# Altium PCB ampV1.PcbDoc
Units mil, origin at the board's own origin, x right, y up, seen from the top; angles counter-clockwise.
Board outline 3105 x 3105 mil, 2 copper layers (Top Layer, Bottom Layer); 56 components, 45 nets, 160 pads, 14 vias.
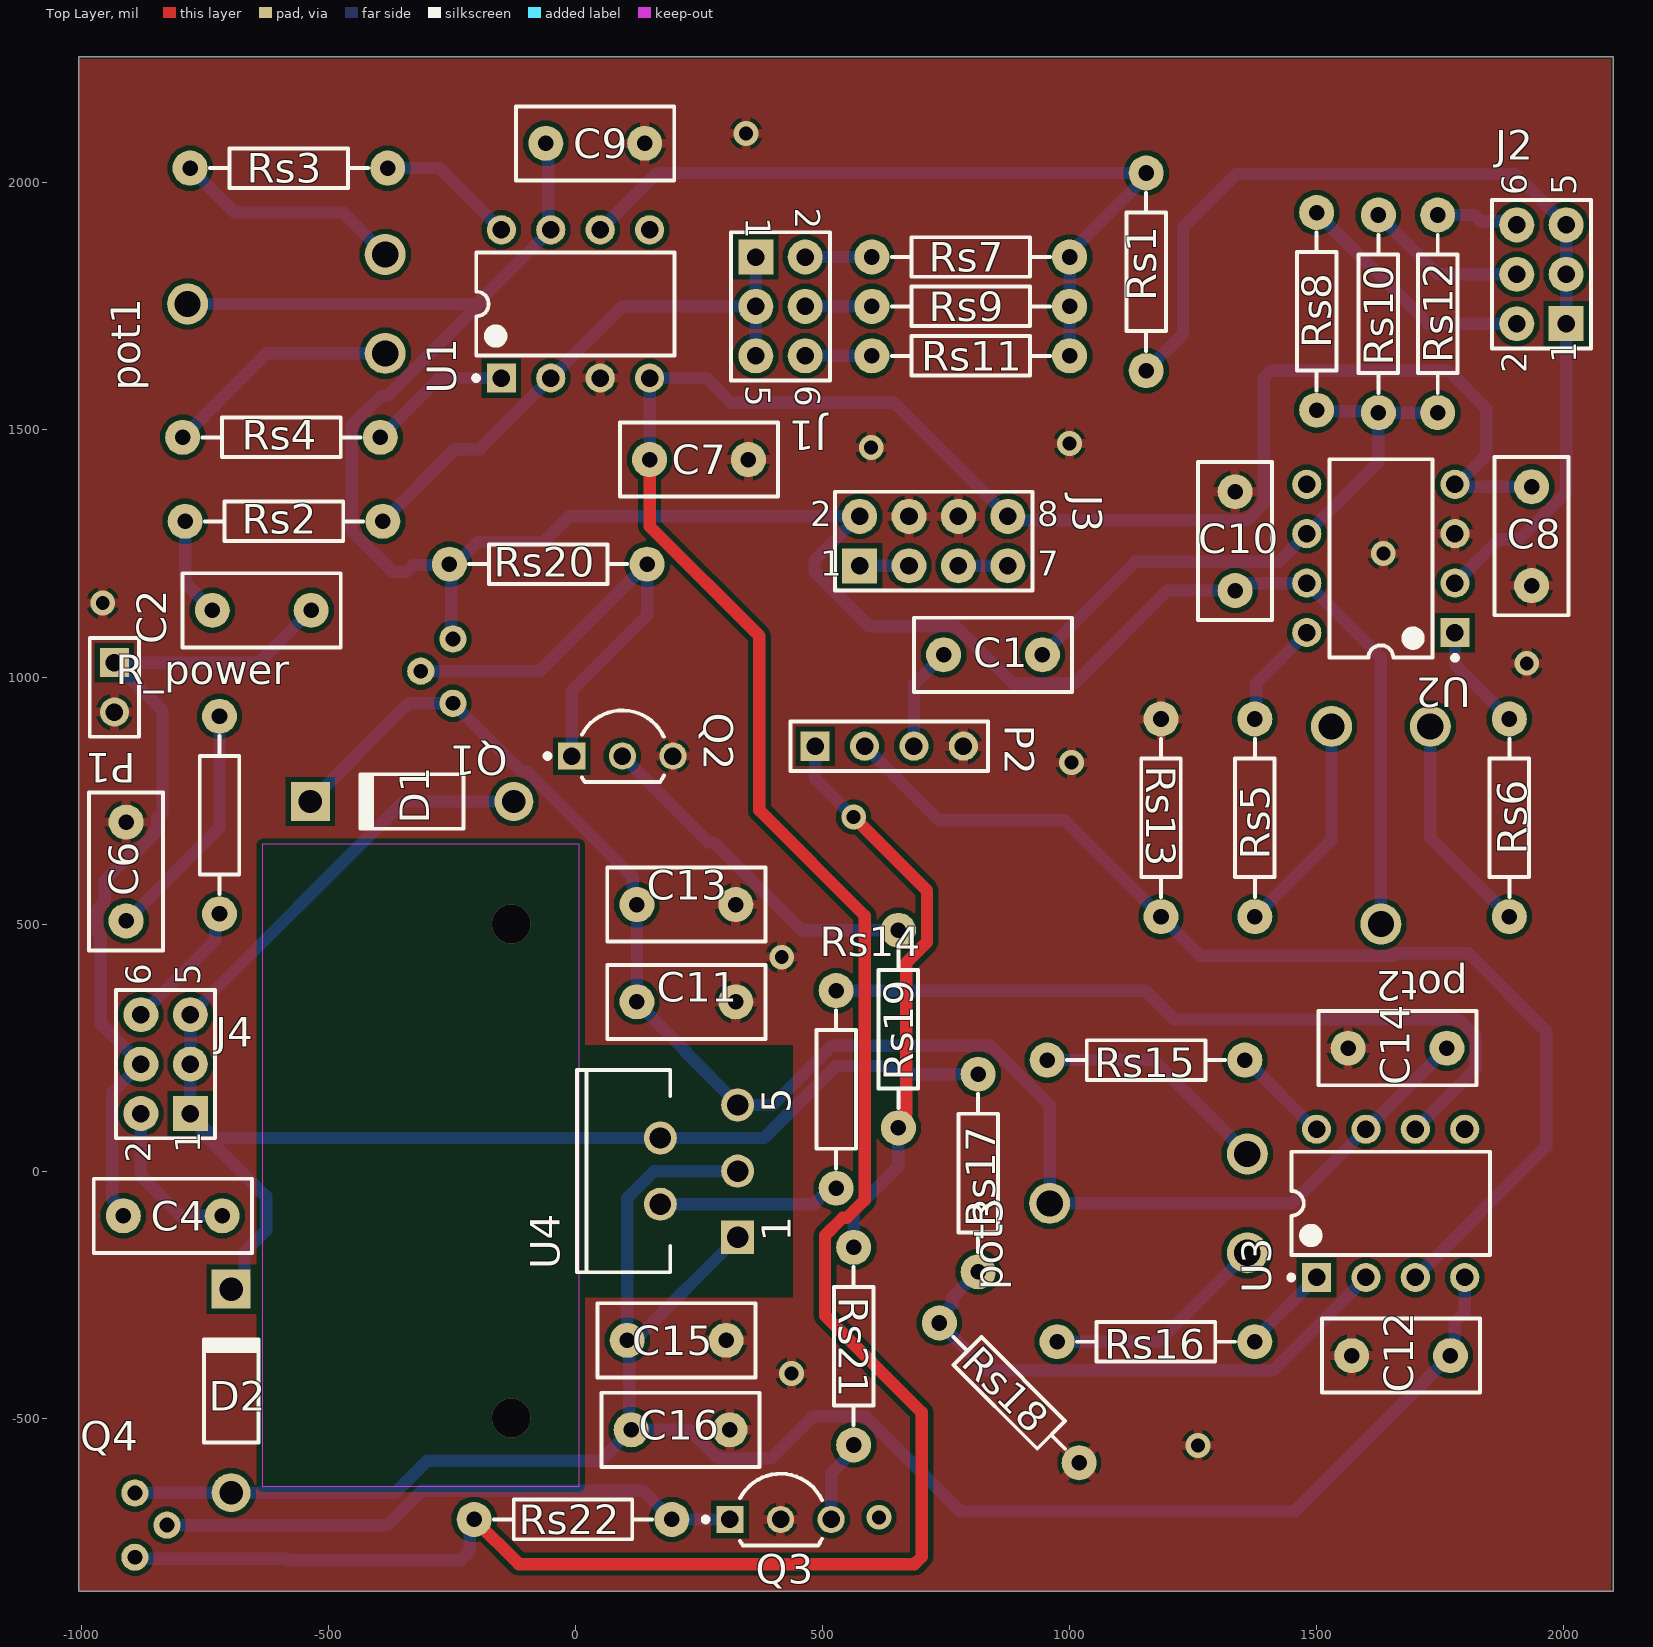
[diagram p0: Top Layer view]
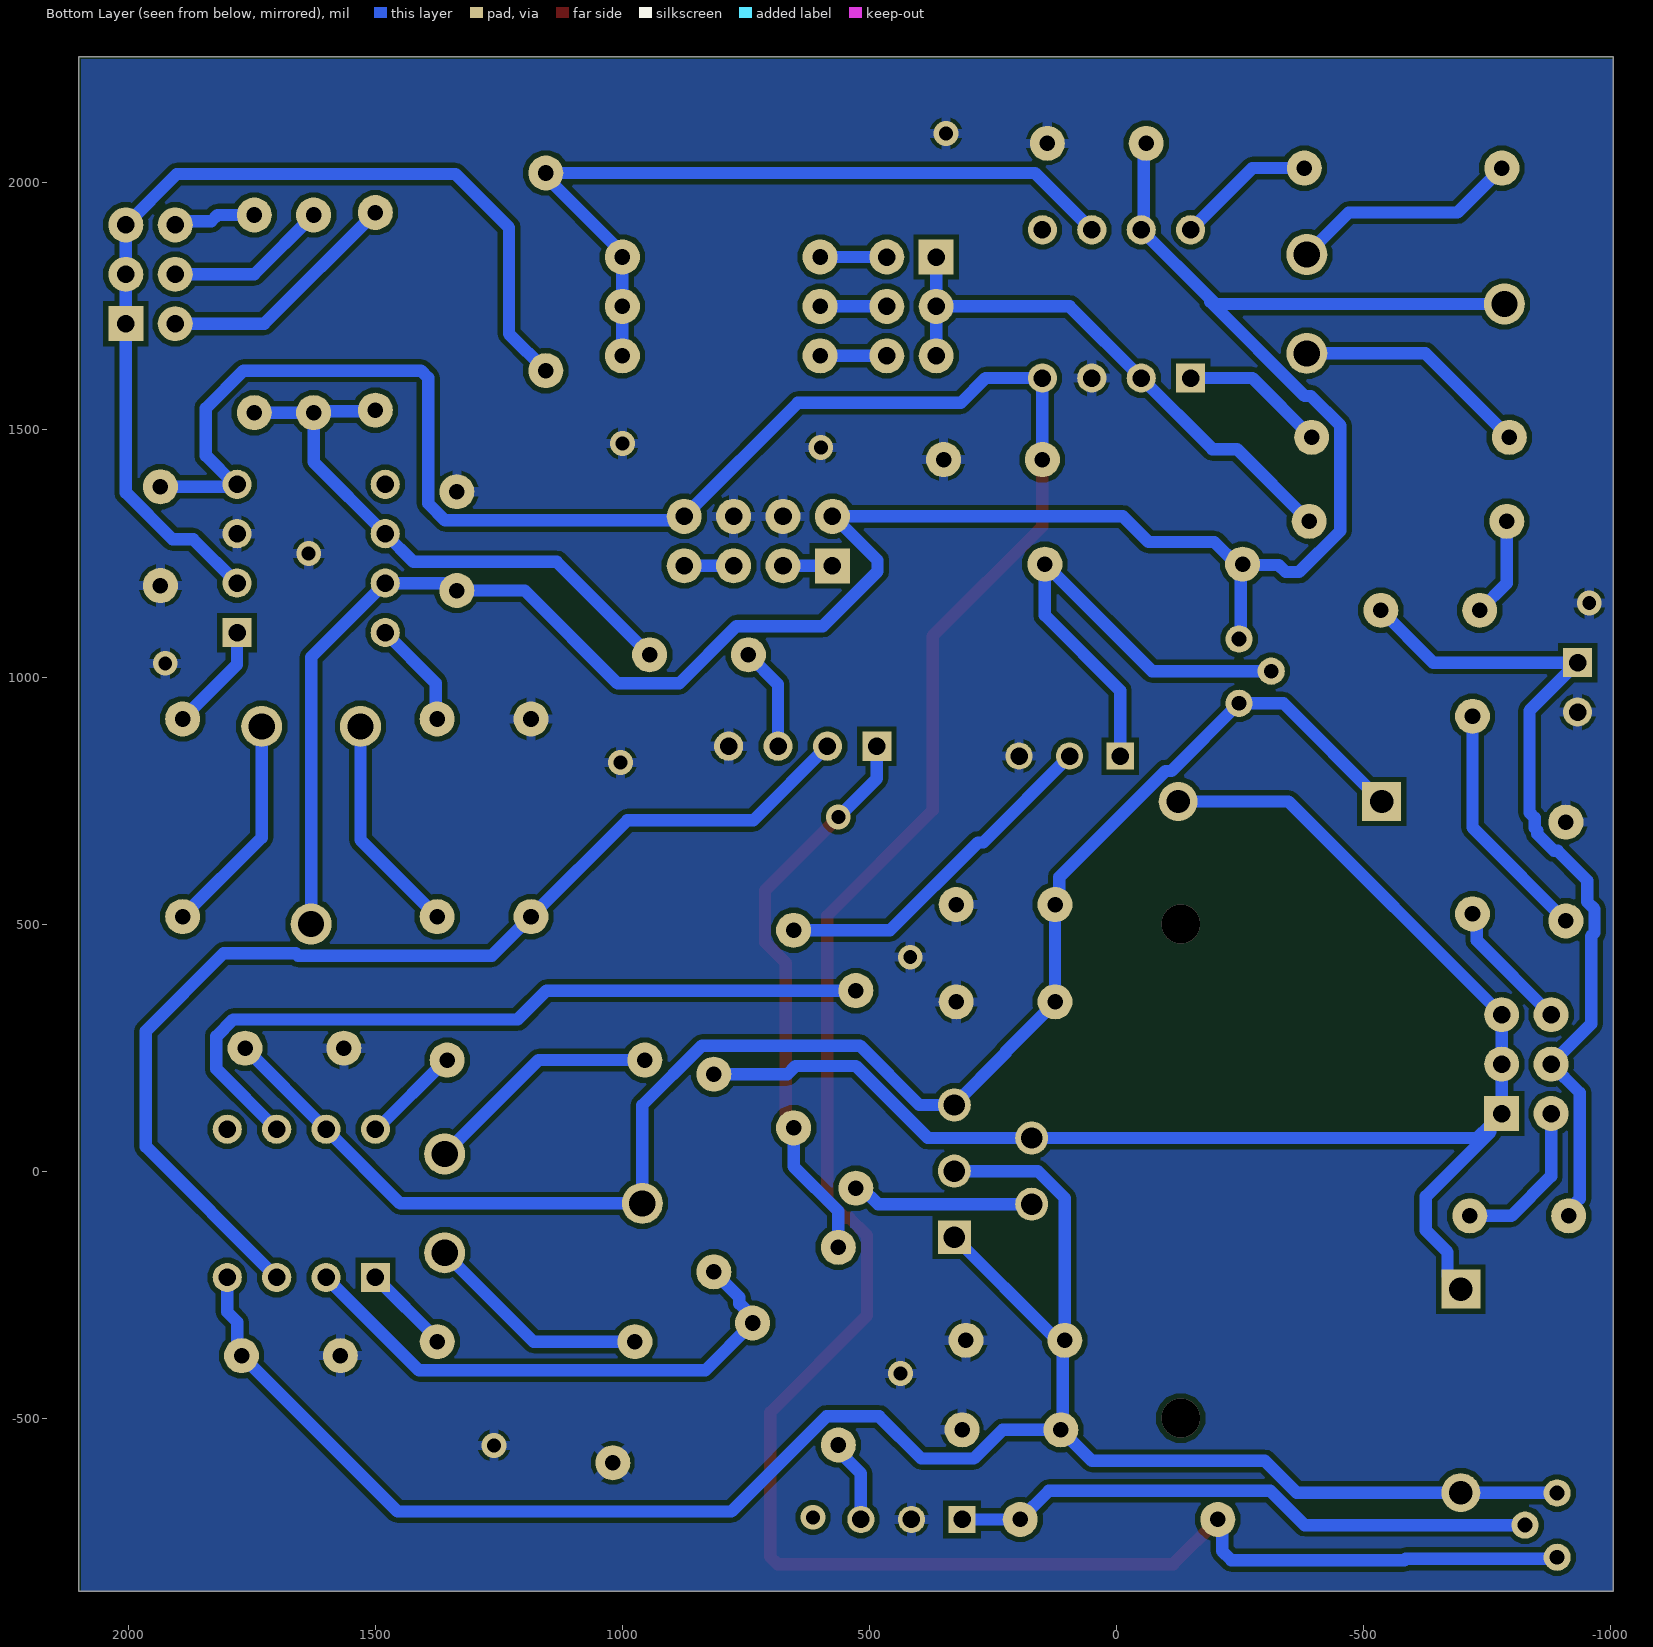
[diagram p1: Bottom Layer view, seen from below]

## Layer stack, top to bottom
Top Solder: solder mask 0.4, Solder Resist, Dk 3.5
Top Layer: signal copper 1.4
Dielectric 1: dielectric 12.6, FR-4, Dk 4.8
Bottom Layer: signal copper 1.4
Bottom Solder: solder mask 0.4, Solder Resist, Dk 3.5

## Board outline
-1005,-850 2100,-850 2100,2255 -1005,2255

## Design rules (kind name [scope] priority, off if disabled: settings)
Clearance [All] p1: gap=10 ignorepadtopadclearanceinfootprint=FALSE except(0: Arc-Hole Track-Hole SMDPad-Hole THPad-Hole Via-Hole Fill-Hole Poly-Hole Region-Hole Text-Hole)
HoleSize [All] p1: absolutevalues=TRUE maxlimit=118.11 minlimit=27.56 maxpercent=80.000 minpercent=20.000
MinimumSolderMaskSliver [All] p1: minsoldermaskwidth=4.92
PlaneConnect [All] p1: planeconnectstyle=Relief reliefexpansion=20 reliefentries=4 reliefconductorwidth=12 reliefairgap=10
PolygonConnect [All] p1: connectstyle=Relief reliefconductorwidth=19.68 reliefentries=4 polygonreliefangle="90 Angle" airgapwidth=7.87
RoutingVias [All] p1: holewidth=27.56 width=62.99 viastyle="Through Hole" minholewidth=27.56 minwidth=62.99 maxholewidth=27.56 maxwidth=62.99
SilkToSilkClearance [All] p1: silktosilkclearance=4.72
SilkToSolderMaskClearance [IsPad] p1: minsilkscreentomaskgap=3.94 clearancetoexposedcopper=TRUE
SolderMaskExpansion [All] p1: expansion=4 istentingtop=FALSE
Width [All] p1: maxlimit=120 minlimit=12 preferedwidth=20
25 further rules are at their usual default settings.

## Components (designator, comment, footprint, x,y, rotation, side; value= is the part's Value field where it differs from the comment)
C1 "Cap" "RAD-0.2  PCBK" 845,1045 r180 top value=100nF
C2 "Cap" "RAD-0.2  PCBK" -635,1135 r180 top value=100nF
C4 "Cap" "RAD-0.2  PCBK" -814.96,-90.55 r180 top value=47nF
C6 "Cap" "RAD-0.2  PCBK" -909.45,606.3 r90 top value=4.7uF
C7 "Cap" "RAD-0.2  PCBK" 250,1440 r180 top value=100nF
C8 "Cap" "RAD-0.2  PCBK" 1935,1285 r90 top value=100nF
C9 "Cap" "RAD-0.2  PCBK" 40,2080 r0 top value=100nF
C10 "Cap" "RAD-0.2  PCBK" 1335,1275 r90 top value=100nF
C11 "Cap" "RAD-0.2  PCBK" 224.41,342.52 r180 top value=100nF
C12 "Cap" "RAD-0.2  PCBK" 1670.81,-373.45 r0 top value=100nF
C13 "Cap" "RAD-0.2  PCBK" 224.41,539.37 r180 top value=4.7uF
C14 "Cap" "RAD-0.2  PCBK" 1663.74,248.8 r0 top value=100nF
C15 "Cap" "RAD-0.2  PCBK" 204.72,-342.52 r180 top value=100nF
C16 "Cap" "RAD-0.2  PCBK" 212.6,-523.62 r180 top value=4.7uF
D1 "Diode 1N4001" DO-41 -330.71,748.03 r180 top
D2 "Diode 1N4001" DO-41 -696.85,-444.88 r90 top
J1 "Header 3X2" "HDR2X3 PCBK" 365,1850 r270 top
J2 "Header 3X2" "HDR2X3 PCBK" 2005,1715 r90 top
J3 "Header 4X2" "HDR2X4 PCBK" 575,1225 r0 top
J4 "Header 3X2" "HDR2X3 PCBK" -779.53,116.54 r90 top
P1 "Transducer" HDR1X2 -933.07,1029.13 r270 top
P2 "Header 4" HDR1X4 485,860 r0 top
pot1 "1k" potMeter_3328P -485,1755 r90 top
pot2 "1k" potMeter_3328P 1630,800 r180 top
pot3 "1k" potMeter_3328P 1259.75,-65.25 r90 top
Q1 "2n2906" TO-18 -248.03,1011.81 r180 top
Q2 "BC547BRL1G" ONSC-TO-92-3-29-11_AM_BL 95,840 r0 top
Q3 "BC557CZL1G" ONSC-TO-92-3-29-11_AM_BL 415,-705 r0 top
Q4 "2n2221" TO-18 -891.77,-716.54 r0 top
R_power "10" "AXIAL-0.4 PCBK" -720.47,720.47 r90 top value=100
Rs1 "300" "AXIAL-0.4 PCBK" 1155,1820 r90 top value=100
Rs2 "1k" "AXIAL-0.4 PCBK" -590,1315 r180 top value=100
Rs3 "4.7k" "AXIAL-0.4 PCBK" -580,2030 r0 top value=100
Rs4 "4.7k" "AXIAL-0.4 PCBK" -595,1485 r0 top value=100
Rs5 "4.7k" "AXIAL-0.4 PCBK" 1375,715 r90 top value=100
Rs6 "4.7k" "AXIAL-0.4 PCBK" 1890,715 r90 top value=100
Rs7 "100k" "AXIAL-0.4 PCBK" 800,1850 r180 top value=100
Rs8 "300" "AXIAL-0.4 PCBK" 1500,1740 r90 top value=100
Rs9 "250k" "AXIAL-0.4 PCBK" 800,1750 r180 top value=100
Rs10 "3k" "AXIAL-0.4 PCBK" 1625,1735 r90 top value=100
Rs11 "500k" "AXIAL-0.4 PCBK" 800,1650 r180 top value=100
Rs12 "6k" "AXIAL-0.4 PCBK" 1745,1735 r90 top value=100
Rs13 "10k" "AXIAL-0.4 PCBK" 1185,715 r270 top value=100
Rs14 "ER VIA" "AXIAL-0.4 PCBK" 527.56,165.35 r90 top value=100
Rs15 "4.7k" "AXIAL-0.4 PCBK" 1154.75,224.75 r0 top value=100
Rs16 "4.7k" "AXIAL-0.4 PCBK" 1174.75,-345.25 r0 top value=100
Rs17 "190k" "AXIAL-0.4 PCBK" 814.96,-3.94 r270 top value=100
Rs18 "10k" "AXIAL-0.4 PCBK" 877.95,-448.82 r315 top value=100
Rs19 "75k" "AXIAL-0.4 PCBK" 653.54,287.4 r90 top value=100
Rs20 "100k" "AXIAL-0.4 PCBK" -55.12,1228.35 r180 top value=100
Rs21 "1k" "AXIAL-0.4 PCBK" 562.99,-354.33 r90 top value=100
Rs22 "100k" "AXIAL-0.4 PCBK" -5,-705 r180 top value=100
U1 "OP37GPZ" ADI-N-8 0,1755 r90 top
U2 "OP37GPZ" ADI-N-8 1630,1240 r180 top
U3 "OP37GPZ" ADI-N-8 1649.75,-65.25 r90 top
U4 "L149" PentawattV 250,0 r90 top

## Footprints (in the part's own frame and the unit in brackets; to place one, negate y for a bottom-side part, rotate by r counter-clockwise, add the part's x,y. Pads: shape width x height; smd on the part's side, far side on the other; paste and mask are expansions set on the pad)
ADI-N-8 [mm] "DIP, 8-Leads, Body 9.59x6.6mm, Pitch 2.54mm"
  rect 1.5x1.5 hole 0.9: 1(-3.81,3.81)
  round 1.5 hole 0.9: 2(-3.81,1.27) 3(-3.81,-1.27) 4(-3.81,-3.81) 5(3.81,-3.81) 6(3.81,-1.27) 7(3.81,1.27) 8(3.81,3.81)
  silkscreen extent -3.93,-5.1 2.65,5.23, body extent -3.95,-5.07 3.95,5.07, height 5.33
"AXIAL-0.4 PCBK" [mm]
  round 1.8 hole 0.8: 1(-5.08,0) 2(5.08,0)
  silkscreen extent -4.06,-1.02 4.06,1.02
DO-41 [mm] "Diode, Axial; Body 5.2 x 2.7 mm (LxDia. max), Lead Dia. 0.86 mm (max)"
  round 2 hole 1.2: 1(-5.23,0)
  rect 2x2 hole 1.2: 2(5.23,0)
  silkscreen extent -2.65,-1.4 2.75,1.4
HDR1X2 [mm] "Connector; Header; 2 Position"
  rect 1.5x1.5 hole 0.9: 1(0,0)
  round 1.5 hole 0.9: 2(2.54,0)
  silkscreen extent -1.27,-1.27 3.81,1.27
HDR1X4 [mm] "Connector; Header; 4 Position"
  rect 1.5x1.5 hole 0.9: 1(0,0)
  round 1.5 hole 0.9: 2(2.54,0) 3(5.08,0) 4(7.62,0)
  silkscreen extent -1.27,-1.27 8.89,1.27
"HDR2X3 PCBK" [mm]
  rect 1.8x1.8 hole 0.9: 1(0,0)
  round 1.8 hole 0.9: 2(0,2.54) 3(2.54,0) 4(2.54,2.54) 5(5.08,0) 6(5.08,2.54)
  silkscreen extent -1.27,-1.27 6.35,3.81
"HDR2X4 PCBK" [mm]
  rect 1.8x1.8 hole 0.9: 1(0,0)
  round 1.8 hole 0.9: 2(0,2.54) 3(2.54,0) 4(2.54,2.54) 5(5.08,0) 6(5.08,2.54) 7(7.62,0) 8(7.62,2.54)
  silkscreen extent -1.27,-1.27 8.89,3.81
ONSC-TO-92-3-29-11_AM_BL [mm] "TO, 3-Leads, Body Dia 4.7mm, Pitch 2.6mm"
  rect 1.4x1.4 hole 0.9: 1(-2.6,0)
  round 1.4 hole 0.9: 2(0,0) 3(2.6,0)
  silkscreen extent -3.97,-1.34 2.13,2.35, body extent -2.84,-1.34 2.84,2.35, height 5.33
PentawattV [mm] "TO, Thru-Hole, Vertical, Heatsink Mounted; 5 Bent Staggered Leads; Pitch 1.7 mm"
  rect 1.7x1.7 hole 1.1: 1(-3.4,-1.99)
  round 1.7 hole 1.1: 2(-1.7,1.99) 3(0,-1.99) 4(1.7,1.99) 5(3.4,-1.99)
  silkscreen extent -5.2,1.48 5.2,6.28
potMeter_3328P [mil]
  round 83 hole 53: 1(-100,-100) 2(0,300) 3(100,-100)
"RAD-0.2  PCBK" [mm]
  round 1.8 hole 0.8: 1(-2.54,0) 2(2.54,0)
  silkscreen extent -4.06,-1.91 4.06,1.91
TO-18 [mil]
  round 55 hole 30: 1(0,-65) 2(65,0) 3(0,65)

## Part data
C1 C2 C4 C6 C7 C8 C9 C10 C11 C12 C13 C14 C15 C16: library part "Cap PCBK", "Capacitor", LatestRevisionDate=17-Jul-2002, LatestRevisionNote="Re-released for DXP Platform.", PackageReference=RAD-0.3, Published=8-Jun-2000, Publisher="Altium Limited"
D1 D2: "1 Amp General Purpose Rectifier", Code_JEDEC=DO-204-AL, ComponentLink1Description="Manufacturer Link", ComponentLink1URL=http://www.fairchildsemi.com/, ComponentLink2Description=Datasheet, ComponentLink2URL=http://www.fairchildsemi.com/ds/1N%2F1N4001.pdf, DatasheetVersion=1998, LatestRevisionDate=17-Jul-2002, LatestRevisionNote="Re-released for DXP Platform.", PackageDescription="Diode, Axial; Body 5.2 x 2.7 mm (LxDia. max), Lead Dia. 0.86 mm (max)", PackageReference=DO-41, PackageVersion=Aug-1999, Published=8-Jun-2000, Publisher="Altium Limited"
J1 J2 J4: library part "Header 3X2 PBCK", "Header, 3-Pin, Dual row", LatestRevisionDate=17-Jul-2002, LatestRevisionNote="Re-released for DXP Platform.", Publisher="Altium Limited"
J3: library part "Header 4X2 PBCK", "Header, 4-Pin, Dual row", LatestRevisionDate=17-Jul-2002, LatestRevisionNote="Re-released for DXP Platform.", Publisher="Altium Limited"
P1: library part "Header 2", "Header, 2-Pin", LatestRevisionDate=17-Jul-2002, LatestRevisionNote="Re-released for DXP Platform.", Publisher="Altium Limited"
P2: "Header, 4-Pin", LatestRevisionDate=17-Jul-2002, LatestRevisionNote="Re-released for DXP Platform.", Publisher="Altium Limited"
pot1 pot2 pot3: library part TrimPotOpAmp
Q2: library part CMP-1048-01605-1, "Amplifier Transistor, NPN Silicon, 3-Pin TO-92, Pb-Free, Tape and Reel", Manufacturer="On Semiconductor", ComponentLink1Description="Manufacturer URL", ComponentLink1URL=http://www.onsemi.com/, ComponentLink2Description=Datasheet, ComponentLink2URL=http://www.onsemi.com/pub_link/Collateral/BC546-D.PDF, ComponentLink3Description="Package Specification", ComponentLink3URL=http://www.onsemi.com/pub_link/Collateral/MAC97-D.PDF, DatasheetVersion="Rev. 7", fT Min (MHz)=150, IC Continuous (A)=0.1, Mounting Technology="Through Hole", PackageDescription="3-Pin Transistor Outline, Body 4.825 x 3.685 mm, Pitch 1.27 mm", PackageReference=TO-92-3-29-11_AM_BL, PackageVersion="Rev. AM", Packing="Tape and Reel", PartNumber=BC547BRL1G, Polarity=NPN, RoHS=TRUE
Q3: library part CMP-1048-01521-1, "Amplifier Transistor, PNP Silicon, 3-Pin TO-92, Pb-Free, Ammo Box", Manufacturer="On Semiconductor", ComponentLink1Description="Manufacturer URL", ComponentLink1URL=http://www.onsemi.com/, ComponentLink2Description=Datasheet, ComponentLink2URL=http://www.onsemi.com/pub_link/Collateral/BC556B-D.PDF, ComponentLink3Description="Package Specification", ComponentLink3URL=http://www.onsemi.com/pub_link/Collateral/MAC97-D.PDF, DatasheetVersion="Rev. 3", IC Continuous (A)=-0.1, Mounting Technology="Through Hole", PackageDescription="3-Pin Transistor Outline, Body 4.825 x 3.685 mm, Pitch 1.27 mm", PackageReference=TO-92-3-29-11_AM_BL, PackageVersion="Rev. AM", Packing="Ammo Box", PartNumber=BC557CZL1G, Polarity=PNP, RoHS=TRUE
R_power Rs1 Rs2 Rs3 Rs4 Rs5 Rs6 Rs7 Rs8 Rs9 Rs10 Rs11 Rs12 Rs13 Rs14 Rs15 Rs16 Rs17 Rs18 Rs19 Rs20 Rs21 Rs22: library part "Res PCBK", "Resistor", LatestRevisionDate=17-Jul-2002, LatestRevisionNote="Re-released for DXP Platform.", PackageReference=AXIAL-0.4, Published=8-Jun-2000, Publisher="Altium Limited"
U1 U2 U3: library part CMP-0384-00210-1, "Single Channel Low Noise Operational Amplifier, 63 MHz BW, 17 V/us SR, Industrial, 8-pin DIP (N-8), Tube", Amplifiers Per Package=1, Generic Part Number=OP37, Input Bias Current=15nA, Input Offset Voltage=30uV, Manufacturer="Analog Devices", Code_JEDEC=MS-001, ComponentLink1Description="Manufacturer URL", ComponentLink1URL=http://www.analog.com/en/index.html, ComponentLink2Description=Datasheet, ComponentLink2URL=http://www.analog.com/static/imported-files/data_sheets/OP37.pdf, ComponentLink3Description="Package Specification", ComponentLink3URL=http:/www.analog.com/static/imported-files/packages/PKG_PDF/PDIP(N)/N_8.pdf, DatasheetVersion="Rev. B", Iq/Amp=5.67mA, Mounting Technology="Through Hole", PackageDescription="8-Pin Plastic Dual In-Line Package, Row spacing 7.62 mm, Pitch 2.54 mm", PackageReference=N-8, PackageVersion=070606-A, Packing=Tube, PartNumber=OP37GPZ, Slew Rate=17V/us, Small Signal Bandwidth=63MHz, V Span Max=44V, V Span Min=8V
U4: library part CMP-0244-00411-1, "Adjustable Voltage and Current Regulator, 5-Pin Pentawatt, Tube", ComponentLink1Description="Manufacturer URL", ComponentLink1URL=http://www.st.com, ComponentLink2Description=Datasheet, ComponentLink2URL=http://www.st.com/internet/com/TECHNICAL_RESOURCES/TECHNICAL_LITERATURE/DATASHEET/CD00000053.pdf, ComponentLink3Description="Package Specification", ComponentLink3URL=http://www.st.com/internet/com/TECHNICAL_RESOURCES/TECHNICAL_LITERATURE/PACKAGE_INFORMATION/CD00004635.pdf, DatasheetVersion=1/01/2000, PackageDescription="TO, Thru-Hole, Vertical, Heatsink Mounted; 5 Bent Staggered Leads; Pitch 1.7 mm", PackageReference=PentawattV, PackageVersion=1/02/2004

## Via types
v1: diameter 50, hole 28, Top Layer to Bottom Layer, 12 vias
v2: diameter 78.74, hole 78.74, Top Layer to Bottom Layer, 2 vias

## Nets (pads, with @x,y where several pads share a name; then routed paths per layer and width w, separated by ;. In a path a pad name is that pad's centre, name@x,y a point inside that pad or via, vN(x,y) a via of type N, cw(c..) or ccw(c..) an arc to the next point about the centre after c; other vN are vias at no path point)
Enable: P2.1 Rs19.1 Rs21.2 | length 1191.8
  Top Layer w25: P2.1 P2.1@500.67,844.33 ; v1(562.99,716.54) 711.48,568.05 711.48,463.41 669.29,421.22 669.29,115.56 653.54,99.81 Rs19.1
  Bottom Layer w25: P2.1 485,794.53 v1(562.99,716.54) ; Rs21.2 562.99,-81.14 653.54,9.41 Rs19.1
FromDAC: P2.2 Rs13.2 U3.3 | length 2230.9
  Bottom Layer w25: P2.2 735,710 990,710 Rs13.2 1264,436 1656.51,436 1661.45,440.94 1807.09,440.94 1964.57,283.46 1964.57,49.57 U3.3
GND: C6.2 C7.1 C8.1 C9.2 C10.2 C11.1 C12.1 C13.1 C14.1 C15.1 C16.1 J3.4 J3.6 P1.2 P2.4 Q2.3 Q3.2 Rs13.1 Rs18.2 U1.3 U2.3
  other v1: 1259.84,-555.12 437.01,-409.45 417.32,433.07 1003.94,826.77 1925.2,1027.56 -956.69,1149.61 1635,1250 598.43,1464.57 1000,1472.44 345,2100
NetC1_1: C1.1 Rs8.1 Rs10.1 Rs12.1 U2.6 | length 1188.6
  Bottom Layer w25: C1.1 1132.93,1232.93 1422.93,1232.93 U2.6 1625,1435 Rs10.1 ; Rs8.1 1502.5,1537.5 1622.5,1537.5 Rs10.1 ; Rs12.1 Rs10.1
NetC2_2: C2.2 Rs2.2 | length 202.8
  Bottom Layer w25: Rs2.2 -790,1190 C2.2
NetC4_1: C4.1 J4.2 | length 324.6
  Bottom Layer w25: J4.2 -879.53,-10.24 -799.21,-90.55 C4.1
NetC6_1: C6.1 R_power.2 | length 511.8
  Bottom Layer w25: C6.1@-923.14,492.61 -720.47,695.28 R_power.2
NetD1_1: D1.1 D2.2 J4.1 J4.3 J4.5 Rs17.1 U4.4 | length 3131.6
  Bottom Layer w25: D2.2 -669.98,-212.11 -669.98,-163.87 -625.98,-119.87 -625.98,-51.18 -756.59,79.43 J4.1@-756.59,93.6 ; D1.1 -348.08,747.98 J4.5 J4.3 J4.1 J4.1@-756.59,93.6 ; Rs17.1 666.14,196.06 649.61,212.6 527.56,212.6 381.89,66.93 U4.4 -729.92,66.93 J4.1@-756.59,93.6
NetJ1_1: J1.1 J1.3 J1.5 Rs2.1 U1.2 | length 1135.2
  Bottom Layer w25: Rs2.1 -243.89,1461.11 -193.89,1461.11 U1.2 95,1750 J1.3 ; J1.5 J1.3 ; J1.1 J1.3
NetJ1_2: J1.2 Rs7.2 | length 135
  Bottom Layer w25: J1.2 Rs7.2
NetJ1_4: J1.4 Rs9.2 | length 135
  Bottom Layer w25: J1.4 Rs9.2
NetJ1_6: J1.6 Rs11.2 | length 135
  Bottom Layer w25: J1.6 Rs11.2
NetJ2_1: J2.1 J2.3 J2.5 Rs1.1 U2.2 | length 2026.2
  Bottom Layer w25: Rs1.1 1229.39,1694.39 1229.39,1909.39 1337.93,2017.93 1902.07,2017.93 J2.5 J2.3 J2.1 2005,1373.07 1910.69,1278.76 1868.76,1278.76 U2.2
NetJ2_2: J2.2 Rs8.2 | length 510.6
  Bottom Layer w25: Rs8.2 1725,1715 J2.2 J2.2@1896.22,1723.78
NetJ2_4: J2.4 Rs10.2 | length 337.2
  Bottom Layer w25: Rs10.2@1632.5,1935 Rs10.2 1745,1815 J2.4
NetJ2_6: J2.6 Rs12.2 | length 168.3
  Bottom Layer w25: Rs12.2 1819.39,1935 1832.07,1922.32 1897.68,1922.32 J2.6
NetJ3_1: J3.1 J3.3 | length 100
  Bottom Layer w25: J3.1 J3.3
NetJ3_5: J3.5 J3.7 | length 100
  Bottom Layer w25: J3.5 J3.7
NetJ4_6: J4.6 R_power.1 | length 277.3
  Bottom Layer w25: J4.6 -729.25,466.81 -729.25,511.7 R_power.1 R_power.1@-720.47,527.97
Netpot1_1: pot1.1 Rs4.1 | length 480.4
  Bottom Layer w25: Rs4.1 -625,1655 pot1.1
Netpot1_3: pot1.3 Rs3.1 | length 467.5
  Bottom Layer w25: Rs3.1 -690,1940 -470,1940 pot1.3
Netpot2_1: pot2.1 Rs6.1 | length 451.3
  Bottom Layer w25: pot2.1 1730,675 Rs6.1
Netpot2_3: pot2.3 Rs5.1 | length 449.2
  Bottom Layer w25: Rs5.1 1530,670 pot2.3
Netpot3_1: pot3.1 Rs16.1 | length 459.6
  Bottom Layer w25: Rs16.1 1179.75,-345.25 pot3.1
Netpot3_3: pot3.3 Rs15.1 | length 483.7
  Bottom Layer w25: Rs15.1 1169.75,224.75 pot3.3
NetQ1_B: Q1.2 Q2.1 Rs20.1 | length 1002.6
  Bottom Layer w25: Q1.2 -71.65,1011.81 Rs20.1 145,1228.23 145,1125 -7.36,972.64 Q2.1 Q2.1@-9.86,837.5
NetQ2_2: Q2.2 Rs19.2 | length 704.6
  Bottom Layer w25: Q2.2 269.79,665.21 280.5,665.21 458.31,487.4 Rs19.2
NetQ3_1: Q3.1 Q4.2 Rs22.1 | length 1192.2
  Bottom Layer w25: Q4.2 -380.8,-716.54 -311.33,-647.07 137.07,-647.07 Rs22.1 Q3.1
NetQ3_3: Q3.3 Rs21.1 | length 171.4
  Bottom Layer w25: Q3.3@518.68,-703.68 Q3.3 517.36,-611.84 562.99,-566.21 Rs21.1
NetRs1_2: Rs1.2 Rs7.1 Rs9.1 Rs11.1 U1.6 | length 1586.8
  Bottom Layer w25: U1.6 165,2020 Rs1.2 1155,2012.5 1000,1857.5 Rs7.1 Rs9.1 Rs11.1
NetRs3_2: Rs3.2 U1.8 | length 281.8
  Bottom Layer w25: Rs3.2 -275,2030 U1.8
NetRs4_2: Rs4.2 U1.1 | length 294.7
  Bottom Layer w25: Rs4.2 -275,1605 U1.1
NetRs5_2: Rs5.2 U2.8 | length 218.5
  Bottom Layer w25: Rs5.2 1377.93,917.93 1377.93,987.93 U2.8
NetRs6_2: Rs6.2 U2.1 | length 220.6
  Bottom Layer w25: U2.1 1780,1025 Rs6.2
NetRs14_1: Rs14.1 U4.2 | length 369.3
  Bottom Layer w25: U4.2 482.86,-66.93 515.15,-34.65 Rs14.1
NetRs14_2: Rs14.2 U3.6 | length 1571
  Bottom Layer w25: Rs14.2 1153.55,365.35 1212.16,306.74 1787.74,306.74 1821.68,272.8 1821.68,206.68 U3.6
NetRs15_2: Rs15.2 U3.8 | length 203
  Bottom Layer w25: Rs15.2 1357.25,224.75 1497.25,84.75 U3.8
NetRs16_2: Rs16.2 U3.1 | length 181.8
  Bottom Layer w25: Rs16.2 1374.75,-340.25 U3.1
NetRs17_2: Rs17.2 Rs18.1 U3.2 | length 1119.3
  Bottom Layer w25: Rs17.2@814.96,-206.52 Rs17.2 763.39,-255.51 763.39,-268.13 736.53,-294.99 Rs18.1 832.32,-403.18 1411.82,-403.18 U3.2
PowerAmpOut: C2.1 C4.2 J4.4 P1.1 | length 1730.3
  Bottom Layer w25: C4.2 -914.96,-78.14 -937.46,-55.64 -937.46,158.6 J4.4 -960.63,297.64 -960.63,475.55 -967.38,482.3 -967.38,530.3 -952.76,544.92 -952.76,588.23 -892.62,648.37 -885.45,648.37 -851.52,682.3 -851.52,689.47 -846.46,694.53 -846.46,714.92 -835.77,725.61 -835.77,931.83 P1.1 -640.87,1029.13 C2.1
SwitchedVCC+: C11.2 C13.2 C14.2 D1.2 pot3.2 Q1.3 U3.7 U4.5 | length 3293.4
  Bottom Layer w25: D1.2 -337.84,946.81 Q1.3 -111.12,809.9 -99.17,809.9 115.63,595.09 115.63,548.15 C13.2 124.41,341.34 224.41,241.34 224.41,238.98 328.35,135.04 U4.5 399.32,133.86 519.46,254 838.96,254 959.75,133.2 pot3.2 1449.75,-65.25 U3.7 ; U3.7@1599.75,84.78 C14.2
SwitchedVCC-: C12.2 C15.2 C16.2 D2.1 Q4.3 U3.4 U4.1 U4.3 | length 4184
  Bottom Layer w25: Q4.3 -891.4,-651.16 -697.22,-651.16 D2.1 -364.55,-650.79 -300.22,-586.45 49.77,-586.45 C16.2 ; U4.1 128.46,-333.74 113.5,-333.74 C15.2 ; U4.3 159.44,0 104.72,-54.71 C15.2 ; U3.4 1799.75,-285.25 1779.59,-305.41 1779.59,-364.67 C12.2 1455.33,-688.94 779.53,-688.94 586.99,-496.4 480.37,-496.4 395.22,-581.56 288.6,-581.56 230.67,-523.62 C16.2 ; C15.2 108.66,-346.46 108.66,-519.68 C16.2
ToADC: C1.2 P2.3 | length 222.3
  Bottom Layer w25: P2.3 685,985 C1.2 C1.2@753.78,1036.22
VCC+: C9.1 C10.1 J3.2 pot1.2 pot2.2 Q1.1 Rs20.2 U1.7 U2.7 | length 4899.6
  Bottom Layer w25: pot1.2 -200,1755 -190,1765 ; Q1.1 -251.57,1080.35 -251.57,1224.8 Rs20.2 ; C9.1 -55,2075 -55,1910 U1.7 -190,1765 ; J3.2 J3.2@572.31,1325 ; pot2.2 1630,1040 U2.7 1362.41,1190 1347.41,1175 C10.1 1197.69,1175 1009.76,987.07 884.86,987.07 769,1102.93 594.38,1102.93 483.66,1213.66 483.66,1236.34 J3.2@572.31,1325 ; Rs20.2 -242.71,1228.35 -197.81,1273.24 -64.58,1273.24 -12.82,1325 J3.2@572.31,1325 ; Rs20.2 -256.74,1226.73 -328.05,1226.73 -342.39,1212.39 -369.32,1212.39 -452.93,1296 -452.93,1509 -393.19,1568.74 -380.75,1568.74 -190,1759.49 -190,1765
VCC-: C7.2 C8.2 J3.8 Q4.1 Rs22.2 U1.4 U2.4 | length 6807.6
  Top Layer w25: Rs22.2 -114.61,-795.39 686.14,-795.39 700.79,-780.74 700.79,-488.19 505.06,-292.46 505.06,-130.33 540.9,-94.49 549.65,-94.49 585.49,-58.64 585.49,516.87 372.13,730.23 372.13,1083.02 150,1305.16 C7.2
  Bottom Layer w25: Q4.1 -888.84,-784.47 -585.61,-784.47 -582.68,-787.4 -232.28,-787.4 -213.78,-768.89 -213.78,-713.78 Rs22.2 ; C7.2@150,1470 U1.4 265,1605 315,1555 645,1555 J3.8 ; J3.8@882.93,1317.07 1359,1317.07 1392.93,1351 1392.93,1605.36 1407.58,1620 1766.93,1620 1842.93,1544 1842.93,1447.93 1785,1390 U2.4 1785,1385 C8.2
pads on no net: U1.5 U2.5 U3.5
copper on no net:
  other v1: 614.17,-700.79
  other v2: -129.92,-500 -129.92,500

## Polygon pours and split planes (outlines as drawn)
GND on Bottom Layer "q" (solid, remove dead copper, pour order 1): -1005,2250 -1005,-850 2095,-850 2095,2250
GND on Top Layer "GND_L01_P002" (solid, remove dead copper, pour order 2): -1005,-850 2095,-850 2095,2250 -1005,2250

## Keep-outs
Top Layer:
  rectangle: -633.86,-637.8 7.87,661.42

## Other copper
Top Layer:
  pour cut-out: -629.92,657.48 0,657.48 0,254.72 439.37,254.72 439.38,-255 0,-255 0,-637.8 -629.92,-637.8

## Text inside footprints (layer, text, board x,y; h text height)
J1: Top Overlay "1" at 345,1930 h50 r270; Top Overlay "2" at 445,1950 h50 r270; Top Overlay "5" at 345,1590 h50 r270; Top Overlay "6" at 445,1590 h50 r270
J2: Top Overlay "1" at 2025,1635 h50 r90; Top Overlay "2" at 1925,1615 h50 r90; Top Overlay "5" at 2025,1975 h50 r90; Top Overlay "6" at 1925,1975 h50 r90
J3: Top Overlay "2" at 475,1305 h50; Top Overlay "1" at 495,1205 h50; Top Overlay "7" at 935,1205 h50; Top Overlay "8" at 935,1305 h50
J4: Top Overlay "6" at -859.53,376.54 h50 r90; Top Overlay "5" at -759.53,376.54 h50 r90; Top Overlay "2" at -859.53,16.54 h50 r90; Top Overlay "1" at -759.53,36.54 h50 r90
U4: Top Overlay "5" at 435.63,117.32 h59.06 r90; Top Overlay "1" at 435.63,-142.52 h59.06 r90